# EAGLE board 555timer (EAGLE 9.2.0)
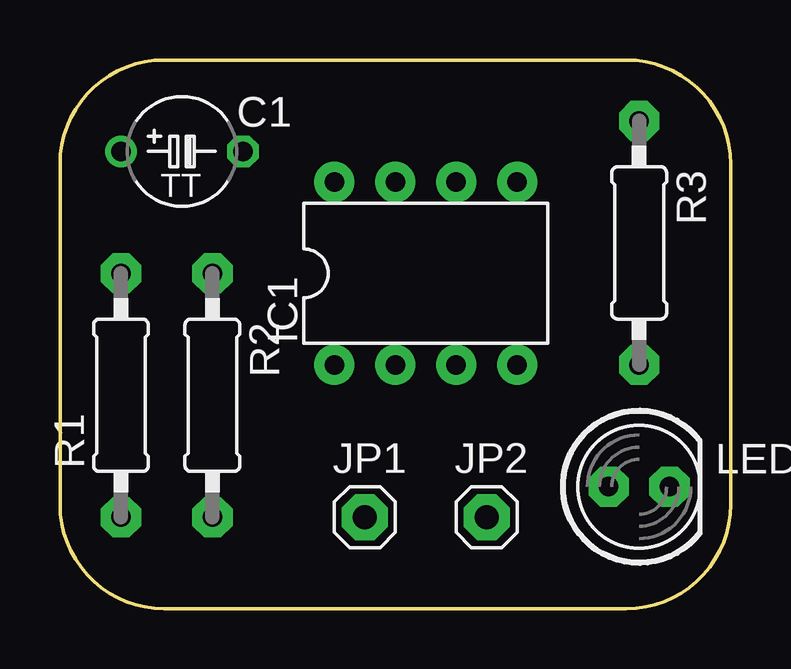
[diagram p0: board, top side]
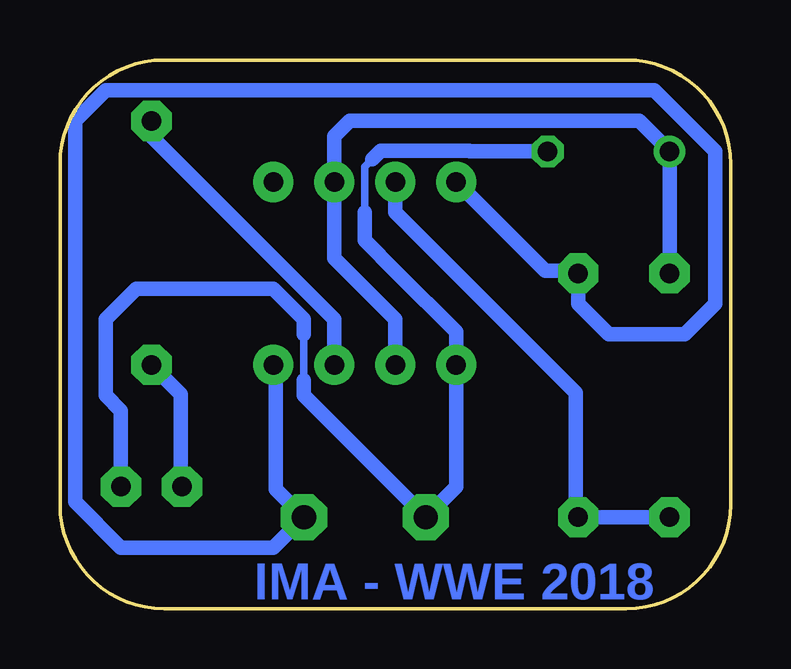
[diagram p1: board, bottom side, seen from below]

Size 27.94 x 22.86 mm. Coordinates in mm from the lower left corner, seen from the top.
Outline: 0,18.52 0,4.34 arc90 4.34,0 23.6,0 arc90 27.94,4.34 27.94,18.52 arc90 23.6,22.86 4.34,22.86 arc90 0,18.52
Copper layers (1*16): Top 0.035mm / dielectric 1.5mm / Bottom 0.035mm
Design rules "default": minimum track width 6mil, minimum drill 0.35mm, track to track 6mil, track to pad 6mil, pad to pad 6mil, via to via 6mil, smd to smd 6mil, copper to edge 40mil, drill to drill 6mil, minimum pad ring 10mil, minimum via ring 8mil, stop-mask expansion 4mil, vias tented up to drill 0mil, thermal gap 10mil

## Footprints (pad centres in the part's own frame; a part is rotated, then mirrored left to right if it is on the bottom)
TAP5-45 = drill 0.813: + -2.54,0 | drill 0.813 octagon: - 2.54,0
DIL08-ROUND = drill 0.813 pad 1.676: 1 -3.81,-3.81; 2 -1.27,-3.81; 3 1.27,-3.81; 4 3.81,-3.81; 5 3.81,3.81; 6 1.27,3.81; 7 -1.27,3.81; 8 -3.81,3.81
1X01 = drill 1.016 pad 1.93 octagon: 1 0,0
LED5MM = drill 0.813 pad 1.676 octagon: A -1.27,0; K 1.27,0
0207/10 = drill 0.813 pad 1.676 octagon: 1 -5.08,0; 2 5.08,0

## Placement (x,y rotation side)
C1  1uF  [TAP5-45]  5.08,19.05 0 top
IC1  LM555N  [DIL08-ROUND]  15.24,13.97 0 top
JP1  GND  [1X01]  12.7,3.81 0 top
JP2  VCC  [1X01]  17.78,3.81 0 top
LED1  [LED5MM]  24.13,5.08 0 top
R1  470k  [0207/10]  2.54,8.89 90 top
R2  1k  [0207/10]  6.35,8.89 270 top
R3  1k  [0207/10]  24.13,15.24 270 top

## Library data of the parts
C1 IC1 JP1 JP2 LED1 R1-R3 = adafruit

## Nets
GND: C1.- IC1.1 JP1.1 LED1.K
N$1: IC1.3 R3.1
N$2: LED1.A R3.2
N$3: C1.+ IC1.2 IC1.6 R1.2
N$4: IC1.7 R1.1 R2.2
VCC: IC1.4 IC1.8 JP2.1 R2.1

## Tracks (layer width: path | path; a pad name or v marks a point on that pad's centre or on a via)
GND
  Bottom 0.305: 17.78,11.43 17.78,9.53 | 14.32,19.05 C1.- | 13.92,14.02 15.14,15.24 | 14.92,18.73 15.24,18.41 15.24,16.51
  Bottom 0.61: LED1.K 25.4,8.26 26.03,8.89 26.03,12.06 24.77,13.33 19.05,13.33 17.78,12.06 17.78,11.43 | C1.- 10.87,19.05 10.89,19.08 14.58,19.08 14.92,18.73 | 15.24,16.51 15.24,15.34 13.92,14.02 11.43,11.53 IC1.1 11.43,5.08 JP1.1 17.78,8.89 17.78,9.53
N$1
  Bottom 0.61: R3.1 24.13,19.69 16.51,12.06 IC1.3
N$2
  Bottom 0.152: 22.91,5.08 LED1.A
  Bottom 0.61: R3.2 22.91,8.94 22.91,5.08
N$3
  Bottom 0.61: IC1.2 13.97,12.06 16.51,14.6 IC1.6 16.51,19.69 15.88,20.32 3.81,20.32 C1.+ R1.2
N$4
  Bottom 0.152: 6.45,6.76 6.45,3.86 R2.2
  Bottom 0.305: R1.1 2.59,3.86 6.45,3.86 | R2.2 6.35,8.89 11.43,13.97 | IC1.7 13.92,17.73
  Bottom 0.61: IC1.7 13.97,16.51 6.45,8.99 6.45,3.86 | R2.2 R1.1
VCC
  Bottom 0.152: 18.95,10.11 IC1.4 | 6.45,14.07 R2.1
  Bottom 0.61: IC1.8 7.72,14.07 6.45,14.07 | 18.95,10.11 18.95,4.98 JP2.1 19.05,2.54 25.4,2.54 27.3,4.44 27.3,20.32 26.03,21.59 3.17,21.59 0.63,19.05 0.63,12.7 1.9,11.43 5.08,11.43 6.35,12.7 R2.1

## Text on the board
Bottom: IMA - WWE 2018